# EAGLE board Nu_Preamp (EAGLE 6.3)
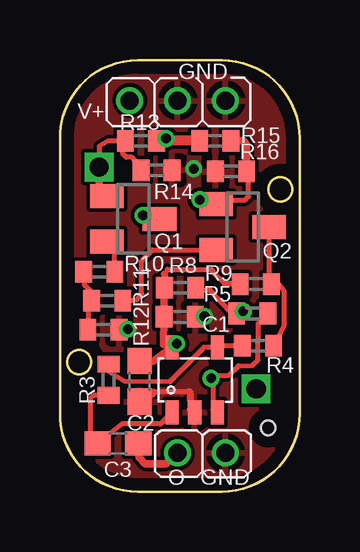
[diagram p0: board, top side]
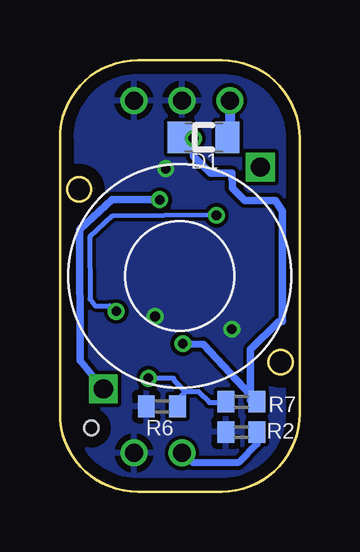
[diagram p1: board, bottom side, seen from below]

Size 10 x 18.01 mm. Coordinates in mm from the lower left corner, seen from the top.
Outline: 0,14.76 0,3.26 arc90 3.25,0.01 6.75,0.01 arc90 10,3.26 10,14.76
Outline: 3.25,18.01 6.75,18.01
Outline: 3.25,0 6.75,0 arc90 10,3.25 10,14.75 arc90 6.75,18 3.25,18 arc90 0,14.75 0,3.25 arc90 3.25,0
Outline: circle at 0.8,5.41 radius 0.5
Outline: circle at 9.2,12.61 radius 0.5
Copper layers (1*16): Top 0.035mm / dielectric 1.6mm / Bottom 0.035mm
Design rules "Elecrow_2-layer_PCB_eagle_rule": minimum track width 6mil, minimum drill 12mil, track to track 6mil, track to pad 8mil, pad to pad 12mil, via to via 12mil, smd to smd 0mil, copper to edge 20mil, drill to drill 10mil, minimum pad ring 6mil, minimum via ring 6mil, stop-mask expansion 0mil, vias tented up to drill 100mil, thermal gap 10mil
Holes 0.6 mm at 8.69,2.67

## Footprints (pad centres in the part's own frame; a part is rotated, then mirrored left to right if it is on the bottom)
C0402 = smd 0.7 x 0.9: 1 -0.65,0; 2 0.65,0
C0603_NK = smd 1.1 x 1: 1 -0.85,0; 2 0.85,0
SOD-323 = smd 1 x 1.3: 1 -1,0; 2 1,0
2P-2MM-TH = drill 0.75: P$1 -1,0; P$2 1,0
3P-2MM-TH = drill 0.75: P$1 -2,0; P$2 0,0; P$3 2,0
SOT23 = smd 1 x 1.4: 1 -0.95,-1.1; 2 0.95,-1.1; 3 0,1.1
R0402 = smd 0.7 x 0.9: 1 -0.65,0; 2 0.65,0
SOT23-5 = smd 0.55 x 1: 1 -0.95,-1.35; 2 0,-1.35; 3 0.95,-1.35; 4 0.95,1.35; 5 -0.95,1.35

## Placement (x,y rotation side)
C1  0.1uF, 25V  [C0402]  5,7.29 0 top
C2  4.7uF, 25V  [C0603_NK]  3.33,4.61 90 top
C3  10uF, 25V  [C0603_NK]  2.42,2.01 0 top
D1  [SOD-323]  4,14.78 180 bottom
H1  2P-2MM-TH-MALE  [2P-2MM-TH]  5.91,1.62 0 top
H2  3P-2MM-TH-MALE  [3P-2MM-TH]  4.92,16.32 0 top
Q1  2SC3324  [SOT23]  3.06,11.38 270 top
Q2  2SC3324  [SOT23]  7.63,11.04 270 top
R2  10k  [R0402]  2.43,2.49 0 bottom
R3  75k  [R0402]  2.03,4.67 90 top
R4  33k  [R0402]  8.27,6.09 180 top
R5  33k  [R0402]  8.03,7.44 0 top
R6  150k  [R0402]  5.74,3.56 180 bottom
R7  150k  [R0402]  2.43,3.75 180 bottom
R8  33k  [R0402]  5.02,8.51 180 top
R9  33k  [R0402]  8.17,8.66 180 top
R10  1.2k  [R0402]  1.64,9.17 0 top
R11  1.2k  [R0402]  1.98,7.97 0 top
R12  12k  [R0402]  1.82,6.76 180 top
R13  100k  [R0402]  3.38,14.64 0 top
R14  51k  [R0402]  4.03,13.41 180 top
R15  100k  [R0402]  6.48,14.64 180 top
R16  51k  [R0402]  7.14,13.36 0 top
U1  TLV170  [SOT23-5]  5.62,4.66 0 top

## Library data of the parts
C1-C3 R2 R8-R16 = rcl
D1 = m-pad-2.1
H1 H2 = CYCFI_Con
Q1 Q2 U1 = CYCFI_semicon
R3-R7 = resistor

## Nets
GND: C1.2 C2.1 H1.P$2 H2.P$2 H2.P$3 R2.1 R6.2 R12.1 R14.1 R16.1 U1.2
IN+: Q1.1 R13.1 R14.2
IN-: Q2.1 R15.1 R16.2
N$1: C3.2 H1.P$1 R2.2
N$5: Q1.3 R5.1 R8.1
N$6: Q2.3 R4.1 R9.1
N$9: Q1.2 R10.2
N$10: Q2.2 R11.2
N$13: R10.1 R11.1 R12.2
N$14: R5.2 R6.1 R7.2 U1.3
N$15: R3.2 R4.2 U1.4
N$16: C3.1 R3.1 U1.1
N$19: D1.1 H2.P$1
VCC1: C1.1 C2.2 D1.2 R7.1 R8.2 R9.2 R13.2 R15.2 U1.5

## Tracks (layer width: path | path; a pad name or v marks a point on that pad's centre or on a via)
GND  (via drill 0.4)
  Top 0.203: 3.85,4.14 3.91,4.18 5.4,4.18
  Top 0.3: C2.1 3.5,3.74 3.8,4.04 3.82,4.04 3.92,4.15 3.85,4.14 | 5.4,4.18 5.43,4.11 5.44,3.43 U1.2
  other vias: 5.58,13.47 2.83,6.78 6.03,7.31
  pour Top: -0.07,0 -0.07,18 9.93,18 9.93,0
  pour Bottom: -0.07,0 -0.07,18 9.93,18 9.93,0
IN+  (via drill 0.8)
  Top 0.203: R14.2 3.36,13.58 2.99,13.96 2.77,13.96 2.62,14.11 2.62,14.63 R13.1 2.01,14.64 1.64,14.41 v1.64,13.54
  Top 0.305: Q1.1 1.77,12.56 1.65,12.68 v1.65,13.53 v1.64,13.54
IN-  (via drill 0.4, 0.8)
  Top 0.203: v5.84,12.18 v5.83,12.18 Q2.1 6.48,12.17 7.71,12.17 7.73,12.17 7.87,12.31 7.87,13.28 R16.2
  Top 0.315: R15.1 7.65,14.64 7.78,14.5 7.78,13.48 R16.2
  Bottom 0.315: v5.84,12.18 7.82,12.19 9.17,10.94 9.16,5.49 v8.19,4.29
N$1
  Top 0.315: C3.2 3.3,1.43 3.56,1.17 4.42,1.17 H1.P$1
  Bottom 0.3: R2.2 1.78,1.99 2.56,1.21 4.45,1.21 H1.P$1
N$5  (via drill 0.4)
  Top 0.203: R8.1 5.66,8.4 6.28,8.4 7.09,7.51 R5.1 7.41,7.76 v7.65,7.52 | Q1.3 3.96,11.54 v3.47,11.53
  Bottom 0.203: v3.47,11.53 7.82,11.5 8.75,10.63 8.75,8.03 8.53,7.75 7.91,7.75 v7.65,7.52
N$6
  Top 0.203: Q2.3 8.71,10.08 8.72,9.79 8.72,8.88 R9.1 9.12,8.68 9.34,8.38 9.34,6.9 R4.1
N$9
  Top 0.203: R10.2 2.28,9.94 Q1.2
N$10
  Top 0.203: R11.2 3.22,8.01 3.41,8.27 3.41,9.64 3.86,10.09 Q2.2
N$13
  Top 0.203: 1.31,6.71 R12.2 1.17,7.81 R11.1 1.32,8.34 1.03,8.62 1.03,9.11 R10.1 1.17,8.89
N$14  (via drill 0.4)
  Top 0.2: 8.27,5.5 8.27,7.02
  Top 0.203: 6.38,4.64 6.58,4.84 7,4.84 7.44,5.26 8.02,5.26 8.27,5.5 | 6.38,4.64 6.38,3.42 U1.3 | v6.31,4.73 6.29,4.73 6.38,4.64 | 8.27,7.02 R5.2
  Bottom 0.203: 4.76,4.17 4.21,4.17 3.76,3.72 3.11,3.72 R7.2 | v6.31,4.73 5.26,4.73 5.26,4.67 4.76,4.17 | 4.76,4.17 4.93,4 4.93,3.73 R6.1
N$15
  Top 0.195: 4.6,4.6 2.69,4.61
  Top 0.203: R4.2 6.43,6.09 U1.4 6,6.03 4.6,4.6 | 2.69,4.61 2.09,4.98 2.09,5.29 R3.2
N$16
  Top 0.203: R3.1 1.43,4.02 1.25,3.89 1.25,2.3 C3.1 2.6,2.83 4.19,2.83 U1.1
N$19
  Bottom 0.406: H2.P$1 2.91,14.87 D1.1
VCC1  (via drill 0.4)
  Top 0.203: 4.36,9.06 4.38,9.06 4.49,9.27 6.33,9.27 6.39,9.19 6.39,9.17 6.88,8.68
  Top 0.25: R9.2 6.88,8.68
  Top 0.3: 4.36,9.06 R8.2
  Top 0.315: U1.5 v4.87,6.17 | C2.2 3.87,5.44 v4.87,6.17 | R8.2 4.35,8.39 C1.1 4.33,6.15 v4.87,6.17
  Top 0.406: R13.2 4.02,14.73 v4.43,14.73 4.52,14.64 R15.2
  Bottom 0.305: 0.72,7.11 0.89,7.09 2.05,5.93 2.06,3.81 R7.1
  Bottom 0.315: 0.72,7.11 0.72,11.71 1.01,12.15 2.28,12.15 2.8,12.67 2.81,13.28 3.72,13.28 4.43,14 v4.43,14.73 | v4.87,6.17 4.01,6.15 R7.1
  Bottom 0.406: D1.2 4.33,14.83 v4.43,14.73

## Text on the board
tNames: GND | V+ | O | GND